# EAGLE board Uno (EAGLE 6.1)
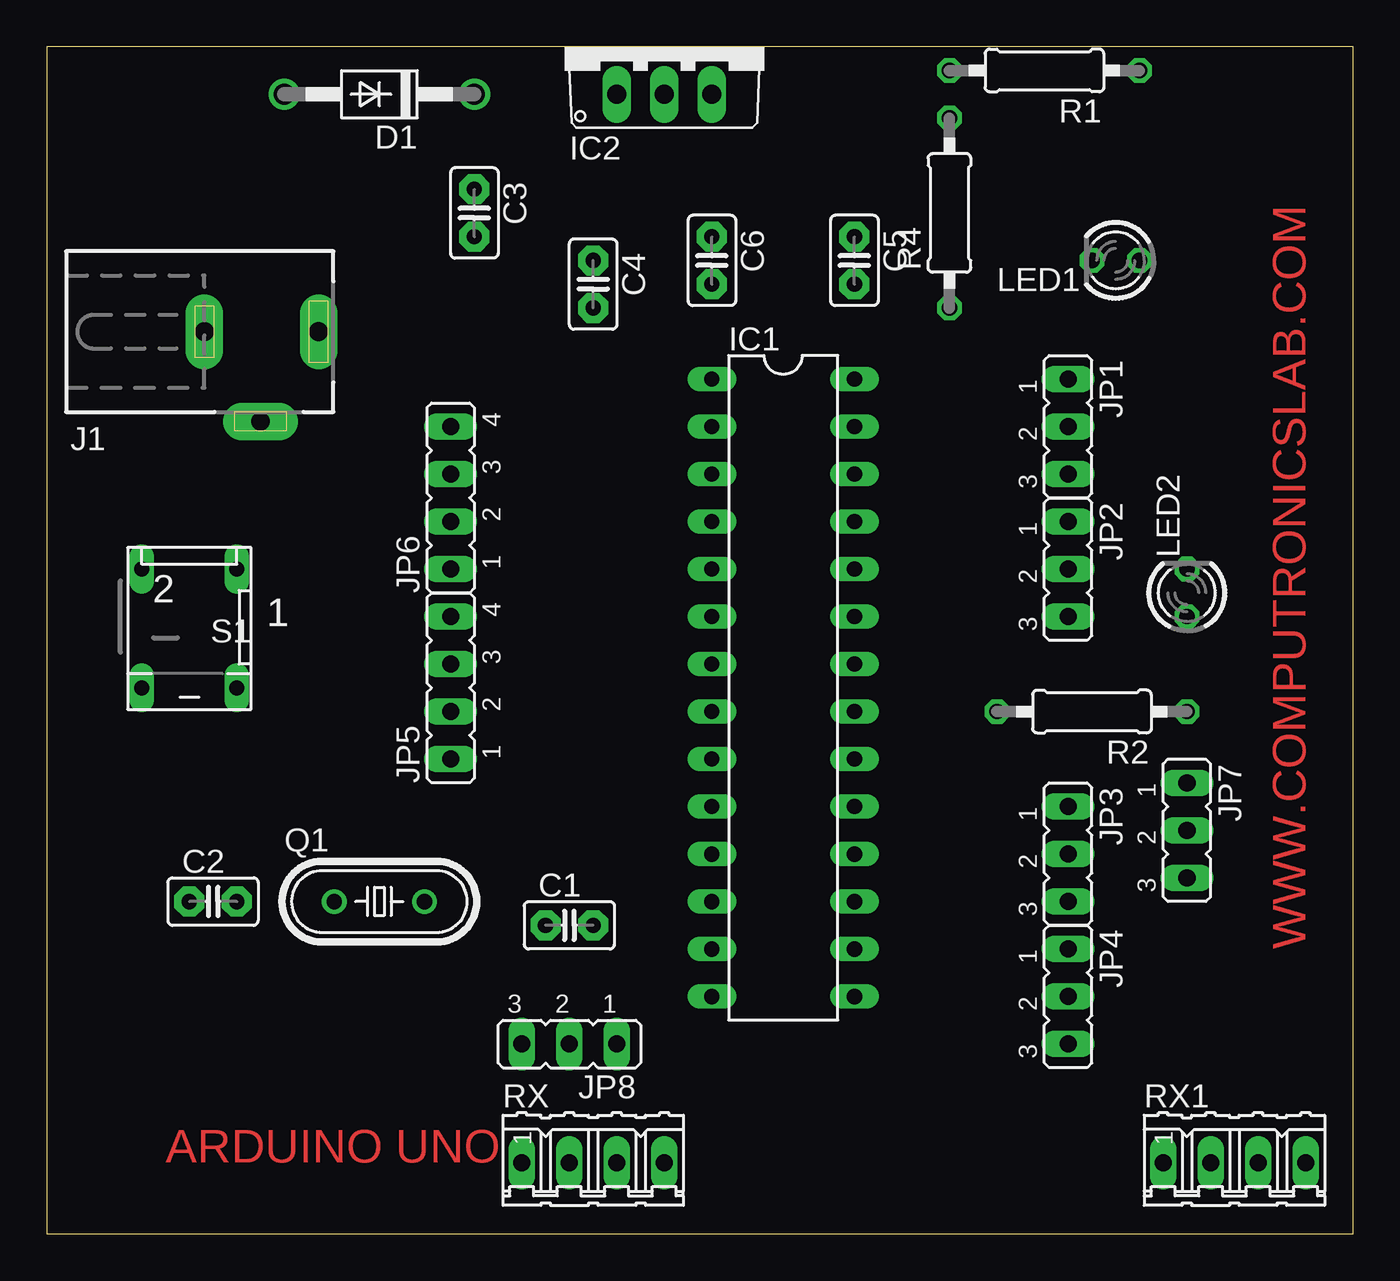
[diagram p0: board, top side]
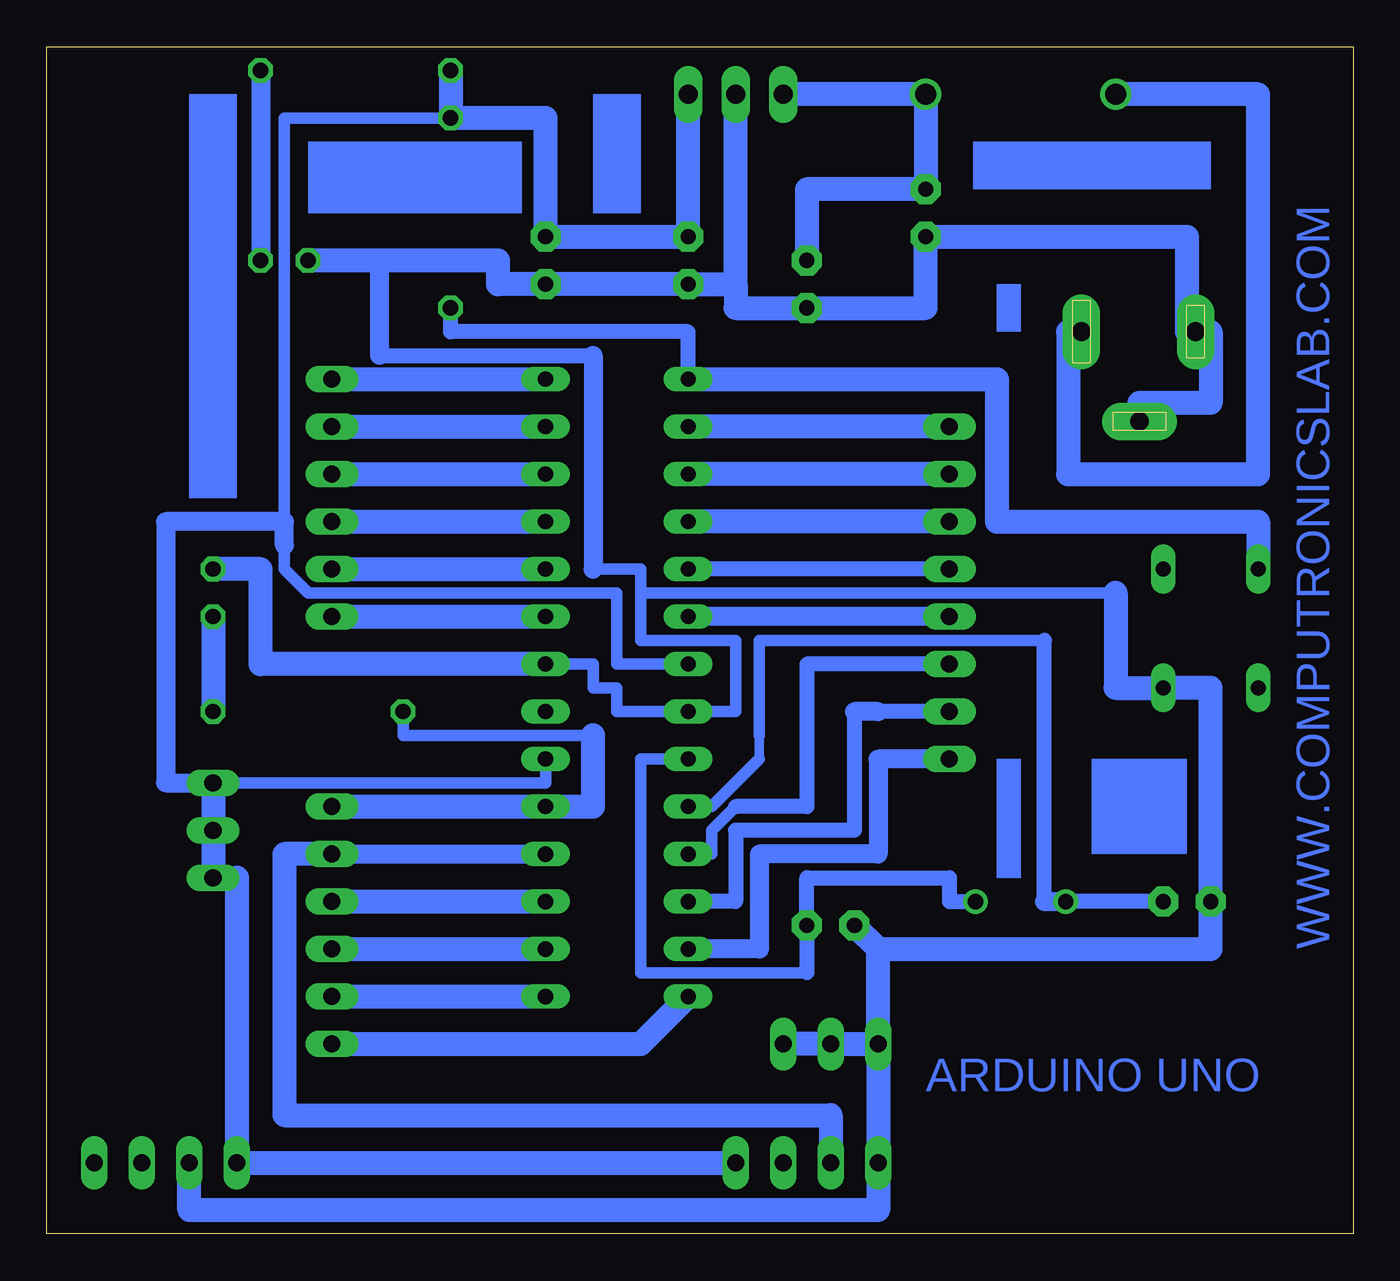
[diagram p1: board, bottom side, seen from below]

Size 69.85 x 63.49 mm. Coordinates in mm from the lower left corner, seen from the top.
Outline: 0,0 69.85,0 69.85,63.49 0,63.49 0,0
Copper layers (1*16): Top 0.035mm / dielectric 1.5mm / Bottom 0.035mm
Design rules: minimum track width 20mil, minimum drill 24mil, track to track 8mil, track to pad 8mil, pad to pad 8mil, via to via 8mil, smd to smd 8mil, copper to edge 40mil, drill to drill 8mil, minimum pad ring 10mil, minimum via ring 8mil, stop-mask expansion 4mil, vias tented up to drill 0mil, thermal gap 10mil

## Footprints (pad centres in the part's own frame; a part is rotated, then mirrored left to right if it is on the bottom)
C2.5-2 = drill 0.813 pad 1.6 octagon: 1 -1.27,0; 2 1.27,0
DO41-10 = drill 1.118: A 5.08,0; C -5.08,0
DIL28-3 = drill 0.813 long: 1 -16.51,-3.81; 2 -13.97,-3.81; 3 -11.43,-3.81; 4 -8.89,-3.81; 5 -6.35,-3.81; 6 -3.81,-3.81; 7 -1.27,-3.81; 8 1.27,-3.81; 9 3.81,-3.81; 10 6.35,-3.81; 11 8.89,-3.81; 12 11.43,-3.81; 13 13.97,-3.81; 14 16.51,-3.81; 15 16.51,3.81; 16 13.97,3.81; 17 11.43,3.81; 18 8.89,3.81; 19 6.35,3.81; 20 3.81,3.81; 21 1.27,3.81; 22 -1.27,3.81; 23 -3.81,3.81; 24 -6.35,3.81; 25 -8.89,3.81; 26 -11.43,3.81; 27 -13.97,3.81; 28 -16.51,3.81
TO220V = drill 1.016 long: 1 -2.54,-2.54; 2 0,-2.54; 3 2.54,-2.54
DCJ0303 = drill 1 pad 2 long: 1 0,3.1; 2 4.8,0; 3 0,-3
JP2 = drill 0.914 long: 1 -2.54,0; 2 0,0; 3 2.54,0
JP4 = drill 0.914 long: 1 -3.81,0; 2 -1.27,0; 3 1.27,0; 4 3.81,0
LED3MM = drill 0.813 octagon: A -1.27,0; K 1.27,0
HC49/S = drill 0.813: 1 -2.413,0; 2 2.413,0
0207/10 = drill 0.813 octagon: 1 -5.08,0; 2 5.08,0
04P = drill 0.914 long: 1 -3.81,0; 2 -1.27,0; 3 1.27,0; 4 3.81,0
DP-02 = drill 0.813 long: 1 -2.54,-2.54; 2 2.54,-2.54; 3 2.54,3.81; 4 -2.54,3.81

## Placement (x,y rotation side)
C1  22pf  [C2.5-2]  27.94,16.51 0 top
C2  22pf  [C2.5-2]  8.89,17.78 0 top
C3  470uF  [C2.5-2]  22.86,54.61 270 top
C4  0.1uf  [C2.5-2]  29.21,50.8 270 top
C5  0.1uf  [C2.5-2]  43.18,52.07 270 top
C6  4.7uf  [C2.5-2]  35.56,52.07 270 top
D1  1N4007  [DO41-10]  17.78,60.96 180 top
IC1  ATMEGA328  [DIL28-3]  39.37,29.21 270 top
IC2  7805  [TO220V]  33.02,63.5 0 top
J1  [DCJ0303]  11.43,48.26 270 top
JP1  3 pin  [JP2]  54.61,43.18 270 top
JP2  3 pin  [JP2]  54.61,35.56 270 top
JP3  3 pin  [JP2]  54.61,20.32 270 top
JP4  3 pin  [JP2]  54.61,12.7 270 top
JP5  4 pin  [JP4]  21.59,29.21 90 top
JP6  4 pin  [JP4]  21.59,39.37 90 top
JP7  [JP2]  60.96,21.59 270 top
JP8  [JP2]  27.94,10.16 180 top
LED1  3mm  [LED3MM]  57.15,52.07 180 top
LED2  3mm  [LED3MM]  60.96,34.29 90 top
Q1  16MHZ  [HC49/S]  17.78,17.78 0 top
R1  220R  [0207/10]  53.34,62.23 180 top
R2  330R  [0207/10]  55.88,27.94 180 top
R4  10K  [0207/10]  48.26,54.61 90 top
RX  [04P]  29.21,3.81 0 top
RX1  [04P]  63.5,3.81 0 top
S1  push switch  [DP-02]  7.62,33.02 180 top

## Library data of the parts
C1-C6 = capacitor-wima
D1 = diode
IC1 = quantum-research-group; OC_FARNELL: unknown; OC_NEWARK: unknown
IC2 = linear
J1 = con-jack; OC_FARNELL: unknown; OC_NEWARK: unknown
JP1-JP8 = jumper
LED1 LED2 = led
Q1 = crystal; OC_FARNELL: 1667008; OC_NEWARK: unknown
R1 R2 R4 = rcl
RX RX1 = con-amp-quick; OC_FARNELL: unknown; OC_NEWARK: unknown
S1 = switch-dil; MPN: MCDP02; OC_FARNELL: 1255233; OC_NEWARK: 26M1095

## Nets
N$1: C1.2 IC1.9 Q1.2
N$2: C2.2 IC1.10 Q1.1
N$3: D1.A J1.1
N$4: C5.1 C6.1 IC1.7 IC1.20 IC2.3 JP7.1 JP7.2 JP7.3 R1.2 R4.2 RX1.1 RX.4
N$5: C1.1 C2.1 C3.2 C4.2 C5.2 C6.2 IC1.8 IC1.22 IC2.2 J1.2 J1.3 JP8.1 JP8.2 JP8.3 LED1.K LED2.K RX1.2 RX.1 S1.4
N$6: LED1.A R1.1
N$7: C3.1 C4.1 D1.C IC2.1
N$8: IC1.28 JP1.1
N$9: IC1.27 JP1.2
N$10: IC1.26 JP1.3
N$11: IC1.25 JP2.1
N$12: IC1.24 JP2.2
N$13: IC1.23 JP2.3
N$14: IC1.5 JP6.1
N$15: IC1.2 JP6.4
N$16: IC1.3 JP6.3
N$17: IC1.4 JP6.2
N$18: IC1.6 JP5.4
N$19: IC1.12 JP5.2
N$20: IC1.11 JP5.3
N$21: IC1.17 JP3.3
N$22: IC1.14 JP4.3
N$23: IC1.15 JP4.2
N$24: IC1.16 JP4.1
N$26: IC1.18 JP3.2 RX.2
N$27: IC1.19 JP3.1 R2.2
N$29: IC1.13 JP5.1
N$31: IC1.1 R4.1 S1.2
N$32: LED2.A R2.1

## Tracks (layer width: path | path; a pad name or v marks a point on that pad's centre or on a via)
N$1
  Bottom 0.61: IC1.9 38.1,25.4 38.1,13.97 29.21,13.97
  Bottom 0.813: Q1.2 21.59,17.78 21.59,19.05 29.21,19.05 C1.2 29.21,13.97
N$2
  Bottom 0.508: 31.75,26.67 31.75,25.4
  Bottom 0.61: 31.75,26.67 31.75,31.75 16.51,31.75 | 31.75,25.4 34.29,22.86 IC1.10
  Bottom 0.813: C2.2 Q1.1 | 16.51,17.78 16.51,31.75
  Bottom 1.016: 16.51,17.78 Q1.1
N$3
  Bottom 1.27: D1.A 5.08,60.96 5.08,40.64 15.24,40.64 15.24,48.26 J1.1
N$4
  Bottom 0.61: IC1.20 43.18,24.13 JP7.1 | IC1.7 39.37,30.48 39.37,34.29 55.88,34.29 57.15,35.56 57.15,36.83 57.15,59.69 43.18,59.69
  Bottom 1.016: JP7.1 63.5,24.13 63.5,38.1 57.15,38.1 57.15,36.83
  Bottom 1.27: JP7.1 JP7.2 JP7.3 59.69,19.05 RX1.1 RX.4 | IC2.3 C6.1 C5.1 43.18,59.69 R4.2 R1.2
N$5
  Bottom 0.61: IC1.22 40.64,30.48 40.64,29.21 39.37,29.21 39.37,27.94 IC1.8 33.02,27.94 33.02,31.75 38.1,31.75 38.1,34.29 | 40.64,35.56 38.1,35.56 38.1,34.29 | 38.1,34.29 12.7,34.29
  Bottom 0.813: 52.07,46.99 40.64,46.99
  Bottom 1.016: 40.64,46.99 40.64,35.56 | 52.07,52.07 52.07,46.99
  Bottom 1.27: JP8.1 JP8.2 JP8.3 | JP8.3 25.4,15.24 | C1.1 25.4,15.24 | 25.4,15.24 7.62,15.24 C2.1 7.62,29.21 S1.4 12.7,29.21 12.7,34.29 | LED2.K 58.42,35.56 58.42,30.48 IC1.22 | J1.2 11.43,44.45 7.62,44.45 7.62,48.26 J1.3 8.89,48.26 8.89,53.34 C3.2 22.86,49.53 C4.2 33.02,49.53 33.02,50.8 | 33.02,50.8 IC2.2 | 33.02,50.8 C6.2 C5.2 45.72,50.8 45.72,52.07 52.07,52.07 LED1.K | JP8.3 RX.1 25.4,1.27 62.23,1.27 RX1.2
N$6
  Bottom 1.016: R1.1 LED1.A
N$7
  Bottom 1.27: IC2.1 D1.C C3.1 29.21,55.88 C4.1
N$8
  Bottom 1.27: JP1.1 IC1.28
N$9
  Bottom 1.27: JP1.2 IC1.27
N$10
  Bottom 1.27: JP1.3 IC1.26
N$11
  Bottom 1.27: JP2.1 IC1.25
N$12
  Bottom 1.27: JP2.2 IC1.24
N$13
  Bottom 1.27: JP2.3 IC1.23
N$14
  Bottom 0.813: JP6.1 IC1.5
N$15
  Bottom 1.27: JP6.4 IC1.2
N$16
  Bottom 1.27: JP6.3 IC1.3
N$17
  Bottom 1.27: JP6.2 IC1.4
N$18
  Bottom 1.016: JP5.4 IC1.6
N$19
  Bottom 0.813: 26.67,27.94 26.67,21.59 33.02,21.59 33.02,17.78 IC1.12 | JP5.2 25.4,27.94
  Bottom 1.016: 25.4,27.94 26.67,27.94
N$20
  Bottom 0.61: 33.02,22.86 34.29,21.59 34.29,20.32 IC1.11
  Bottom 0.813: 33.02,22.86 29.21,22.86 29.21,30.48 JP5.3
N$21
  Bottom 1.27: JP3.3 IC1.17
N$22
  Bottom 1.27: IC1.14 38.1,10.16 JP4.3
N$23
  Bottom 1.27: JP4.2 IC1.15
N$24
  Bottom 1.27: JP4.1 IC1.16
N$26
  Bottom 1.016: JP3.2 IC1.18
  Bottom 1.27: RX.2 27.94,6.35 57.15,6.35 57.15,20.32 JP3.2
N$27
  Bottom 0.61: R2.2 50.8,26.67 40.64,26.67
  Bottom 1.27: JP3.1 IC1.19 40.64,22.86 40.64,26.67
N$29
  Bottom 1.016: IC1.13 31.75,15.24 31.75,20.32 25.4,20.32 25.4,25.4 JP5.1
N$31
  Bottom 0.813: R4.1 48.26,48.26 35.56,48.26 IC1.1
  Bottom 1.27: S1.2 5.08,38.1 19.05,38.1 19.05,45.72 IC1.1
N$32
  Bottom 1.27: LED2.A R2.1
(copper drawn outside any net)
  shapes: Bottom area x7

## Text on the board
Top: WWW.COMPUTRONICSLAB.COM | ARDUINO UNO
Bottom: WWW.COMPUTRONICSLAB.COM | ARDUINO UNO